# EAGLE board attiny85 (EAGLE 9.6.2)
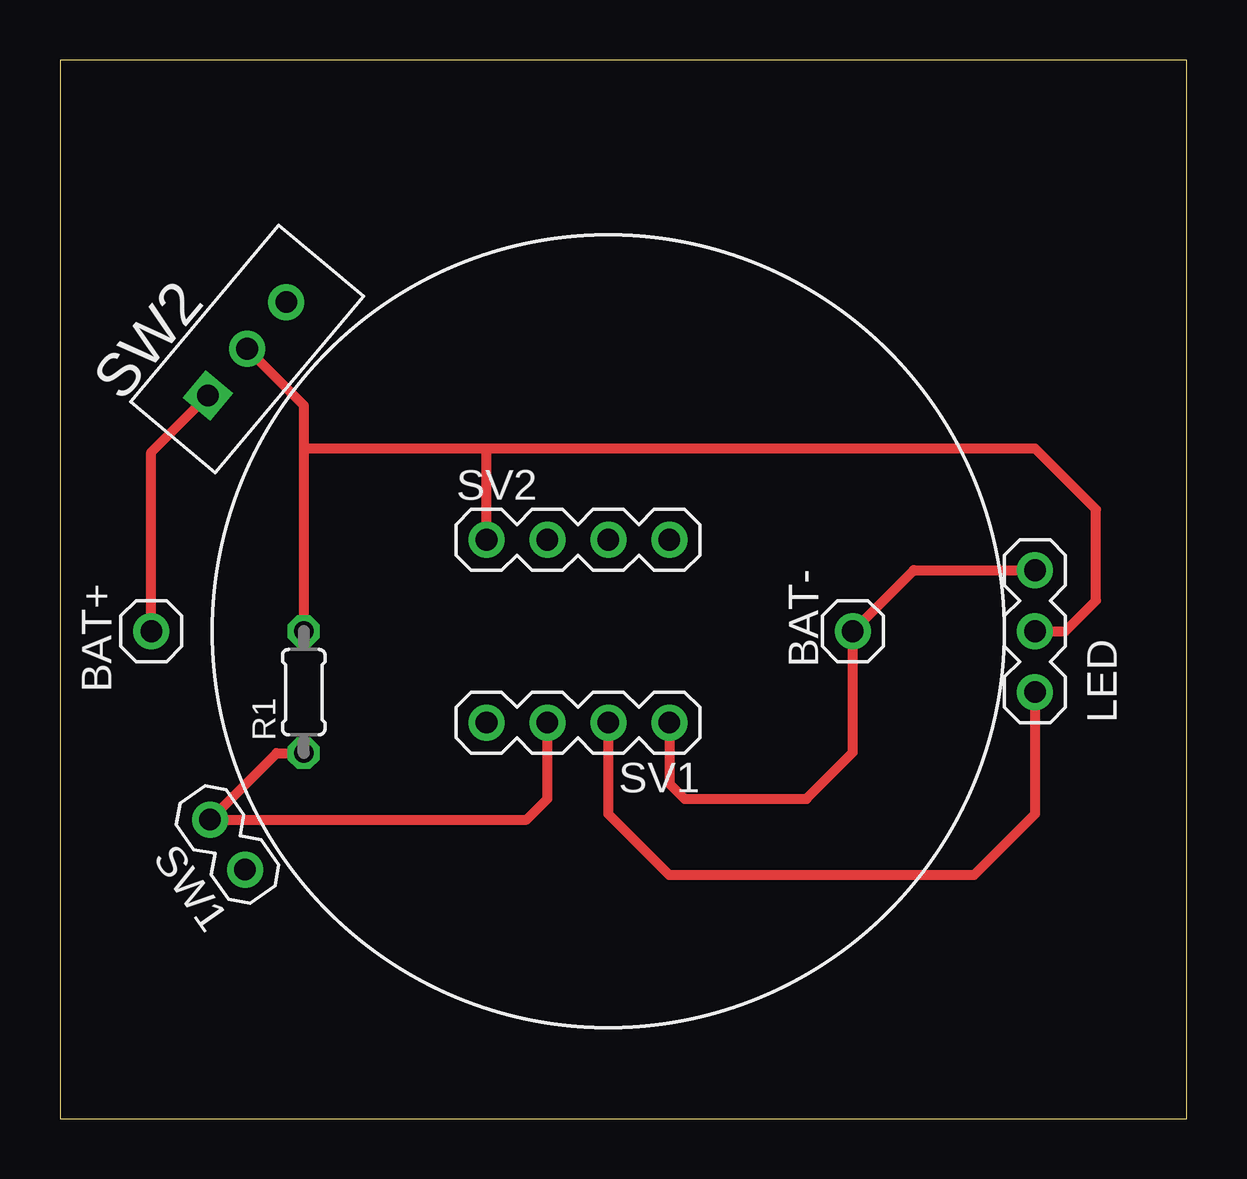
[diagram p0: board, top side]
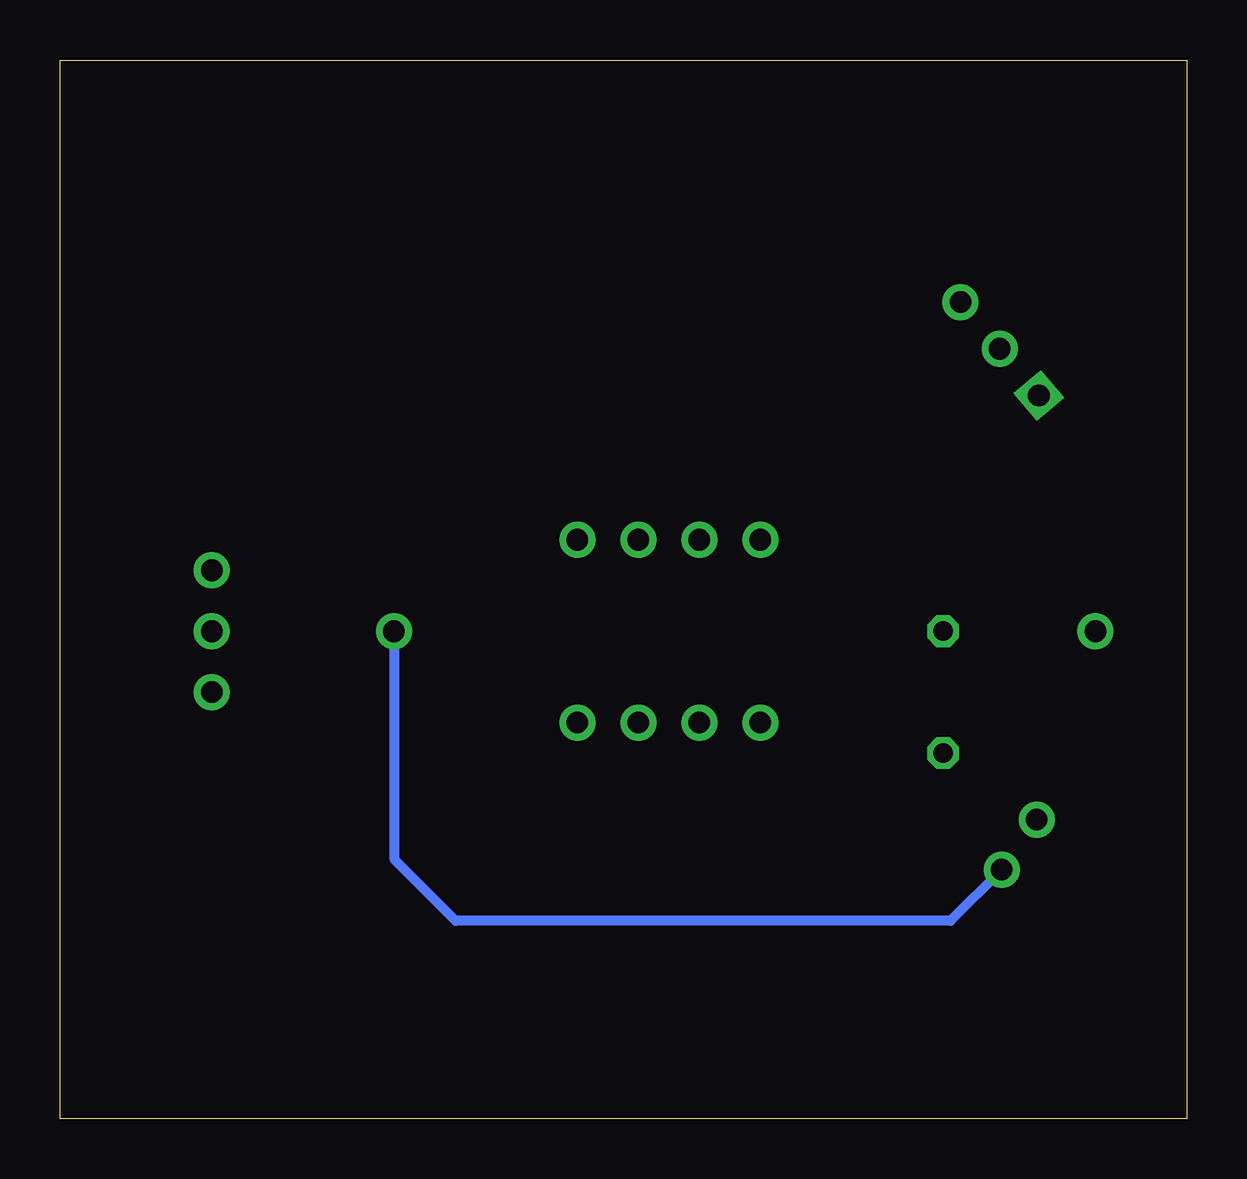
[diagram p1: board, bottom side, seen from below]

Size 46.97 x 44.12 mm. Coordinates in mm from the lower left corner, seen from the top.
Outline: 0,0 46.97,0 46.97,44.12 0,44.12 0,0
Copper layers (1*16): Top 0.035mm / dielectric 1.5mm / Bottom 0.035mm
Design rules "default": minimum track width 6mil, minimum drill 0.35mm, track to track 6mil, track to pad 6mil, pad to pad 6mil, via to via 6mil, smd to smd 6mil, copper to edge 40mil, drill to drill 6mil, minimum pad ring 10mil, minimum via ring 8mil, stop-mask expansion 4mil, vias tented up to drill 0mil, thermal gap 10mil

## Footprints (pad centres in the part's own frame; a part is rotated, then mirrored left to right if it is on the bottom)
PINHEAD-MA01-1 = drill 0.9 pad 1.5: 1 1.27,0
PINHEAD-MA03-1 = drill 0.9 pad 1.5: 1 -1.27,0; 2 1.27,0; 3 3.81,0
0204/5 = drill 0.813 octagon: 1 -2.54,0; 2 2.54,0
PINHEAD-MA04-1 = drill 0.9 pad 1.5: 1 -3.81,0; 2 -1.27,0; 3 1.27,0; 4 3.81,0
PINHEAD-MA02-1 = drill 0.9 pad 1.5: 1 -1.27,0; 2 1.27,0
SW3-1 = drill 0.9 pad 1.5 square: 1 -1.27,0 | drill 0.9 pad 1.5: 2 1.27,0; 3 3.81,0

## Placement (x,y rotation side)
BAT+  [PINHEAD-MA01-1]  2.54,20.32 0 top
BAT-  [PINHEAD-MA01-1]  31.78,20.32 0 top
LED  [PINHEAD-MA03-1]  40.64,21.59 270 top
R1  [0204/5]  10.16,17.78 90 top
SV1  [PINHEAD-MA04-1]  21.59,16.51 180 top
SV2  [PINHEAD-MA04-1]  21.59,24.13 0 top
SW1  [PINHEAD-MA02-1]  6.99,11.43 125 top
SW2  [SW3-1]  6.99,31.11 50 top

## Library data of the parts
BAT+ BAT- SW1 = ytani1
LED SV1 SV2 = ytani1; OC_FARNELL: unknown; OC_NEWARK: unknown
R1 = rcl; SPICEPREFIX: R
SW2 = ytani1; MF: HiLetgo; URL_AMAZON: https://www.amazon.co.jp/gp/product/B01LYVYQNO/

## Nets
+3V3: BAT+.1 SW2.1
BAT+: LED.2 R1.2 SV2.1 SW2.2
GND: BAT-.1 LED.1 SV1.1 SW1.1
PB3: R1.1 SV1.3 SW1.2
PB4: LED.3 SV1.2

## Tracks (layer width: path | path; a pad name or v marks a point on that pad's centre or on a via)
+3V3
  Top 0.406: BAT+.1 3.81,27.78 SW2.1
BAT+
  Top 0.406: LED.2 41.91,20.32 43.18,21.59 43.18,25.4 40.64,27.94 17.78,27.94 | SW2.2 10.16,29.73 10.16,27.94 | 10.16,27.94 R1.2 | 10.16,27.94 17.78,27.94 | SV2.1 17.78,27.94
GND
  Top 0.406: LED.1 35.59,22.86 BAT-.1 33.05,15.27 31.12,13.33 26.03,13.33 25.4,13.97 SV1.1
  Bottom 0.406: SW1.1 9.85,8.25 30.48,8.25 33.02,10.79 33.02,20.29 BAT-.1
PB3
  Top 0.406: SV1.3 20.32,13.33 19.45,12.47 SW1.2 9.03,15.24 R1.1
PB4
  Top 0.406: SV1.2 22.86,12.7 25.4,10.16 38.1,10.16 40.64,12.7 LED.3